# Altium PCB Sound_v2_PCB.PcbDoc
Units mm, origin at the board's own origin, x right, y up, seen from the top; angles counter-clockwise.
Board outline 22.5 x 38.5 mm, 2 copper layers (Top Layer, Bottom Layer), stack 1.571 mm thick; 13 components, 9 nets, 39 pads, 7 vias.
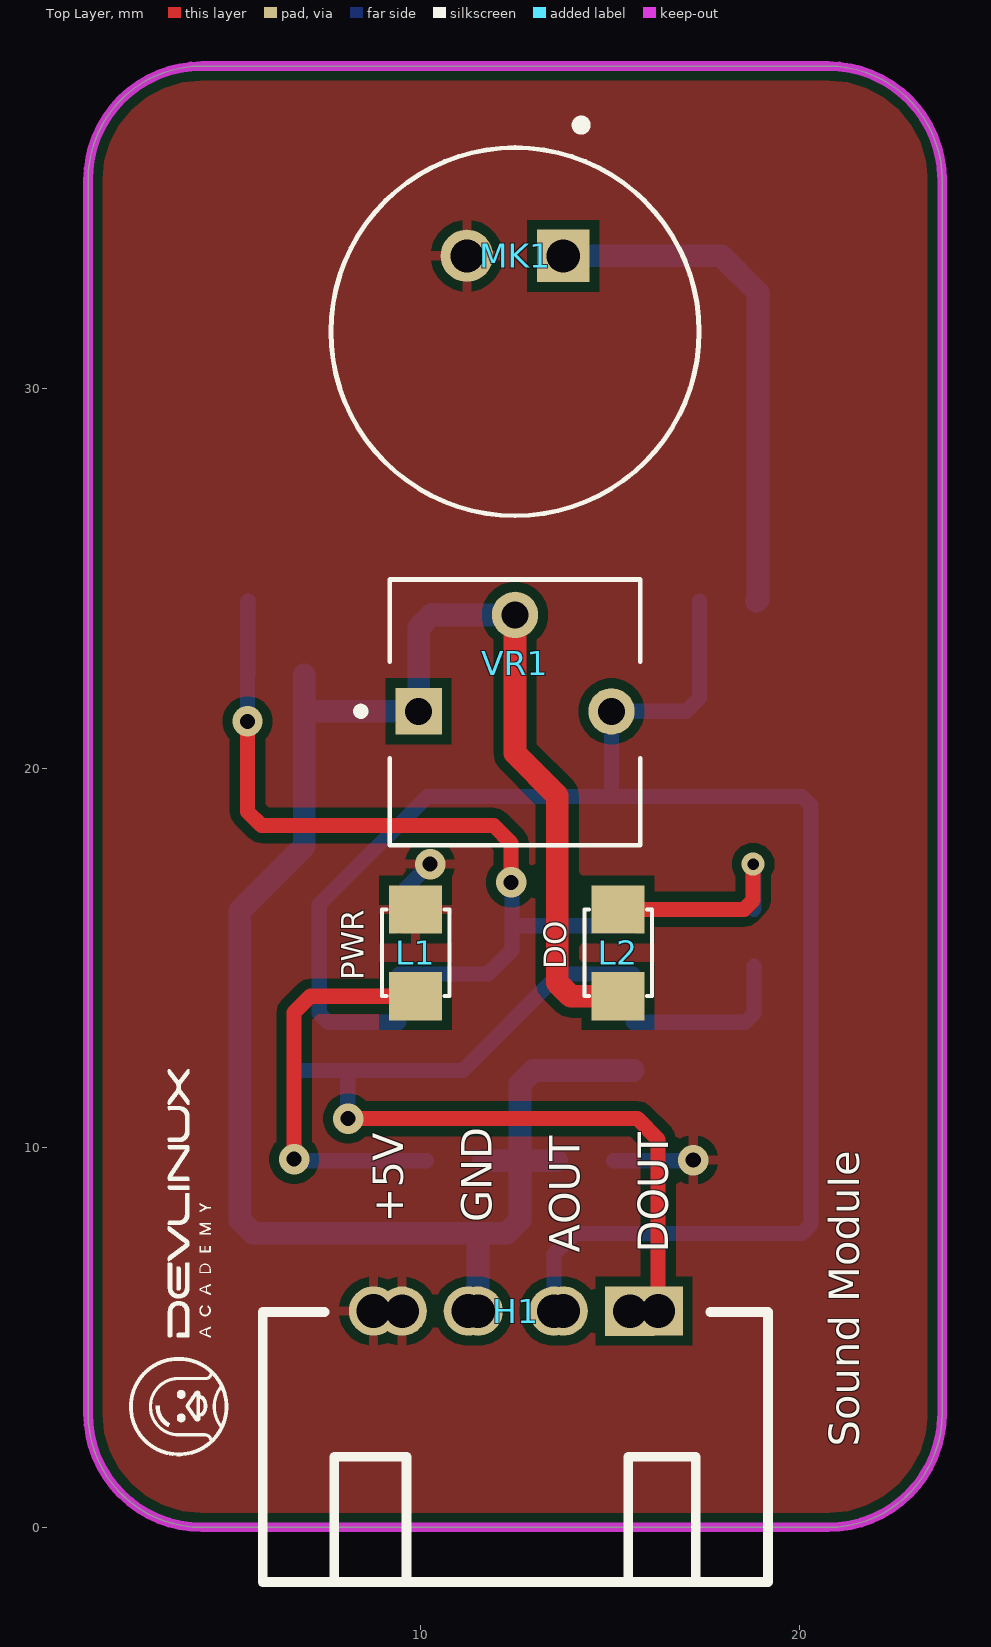
[diagram p0: Top Layer view]
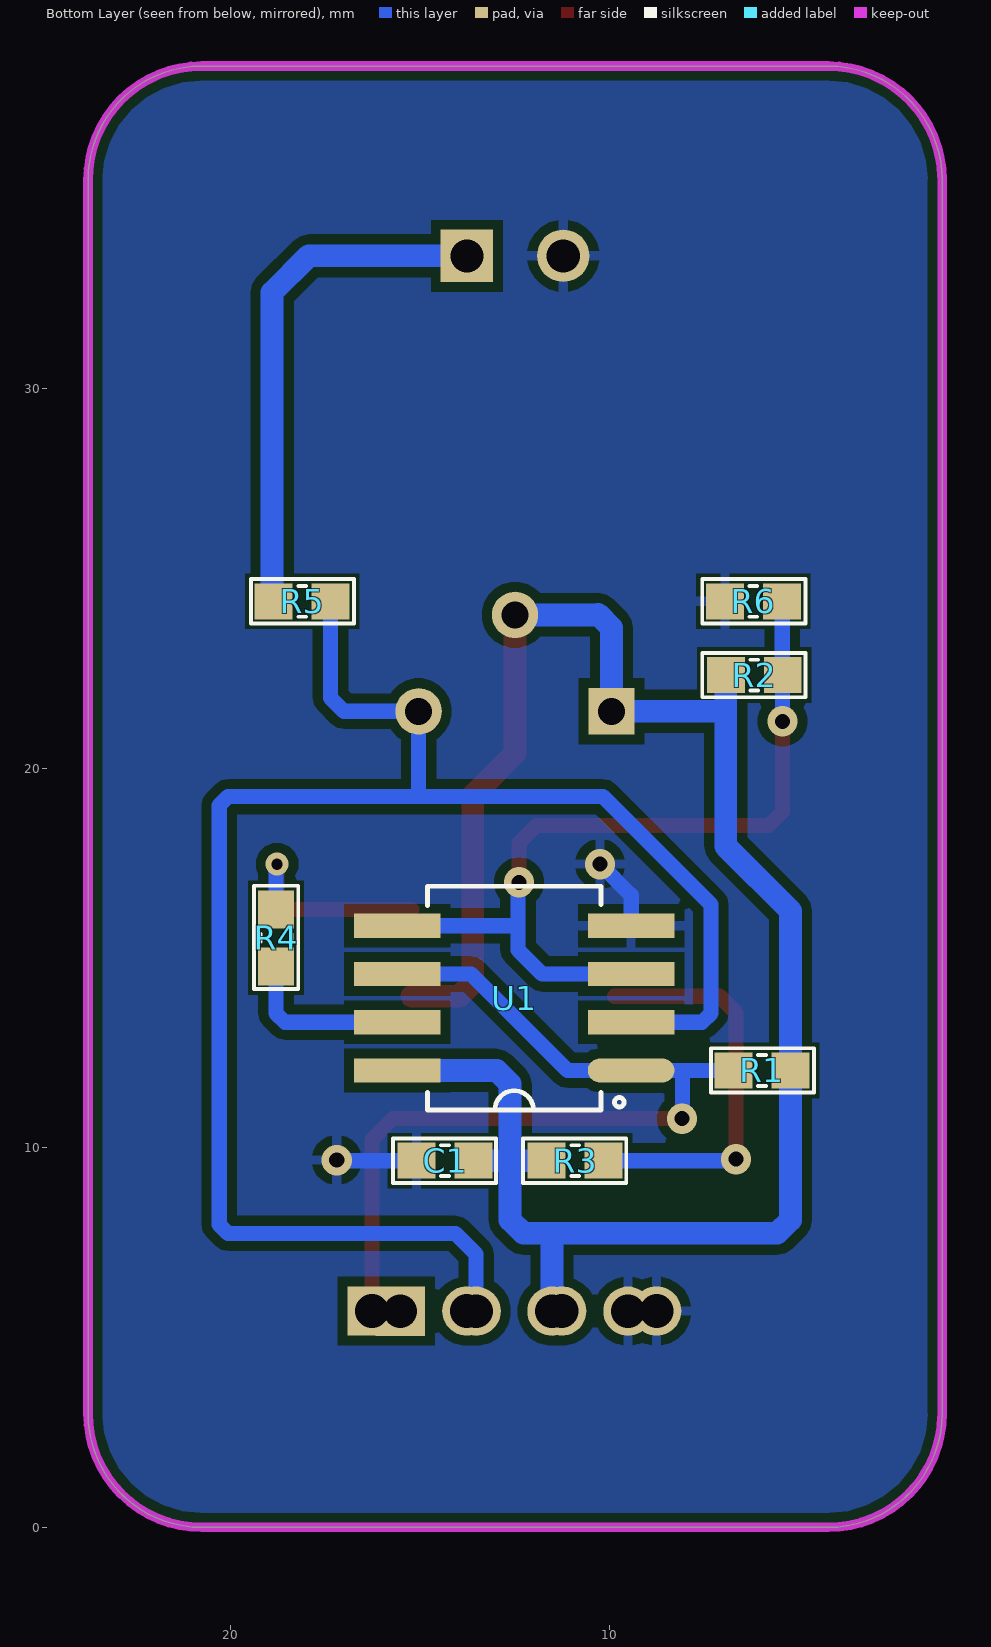
[diagram p1: Bottom Layer view, seen from below]
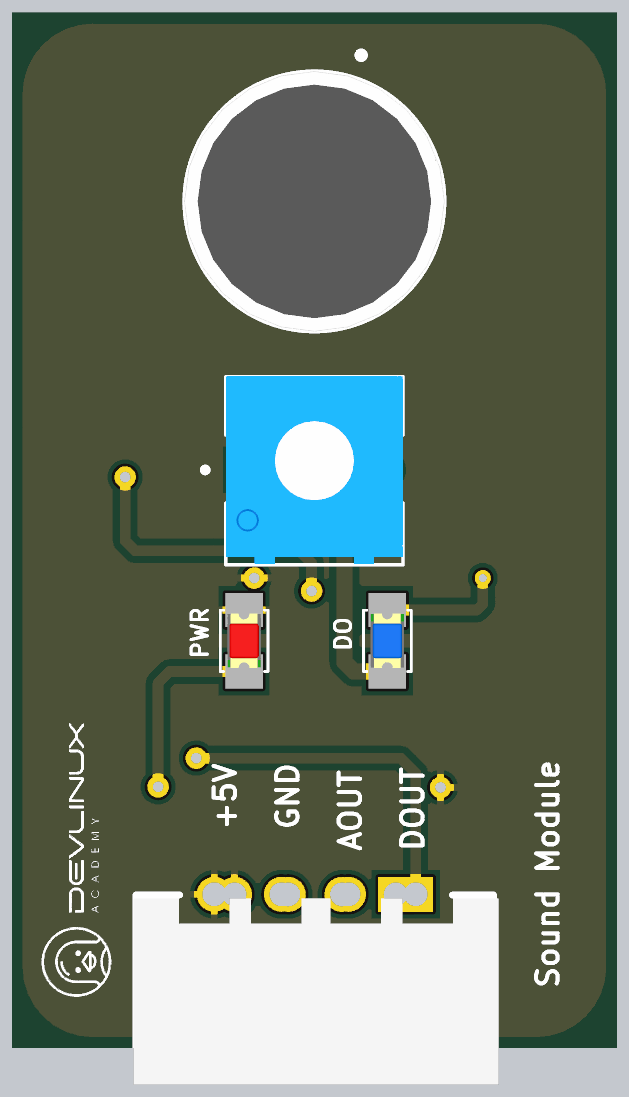
[diagram p2: 3D render of the assembled board from above, using the file's embedded part models]
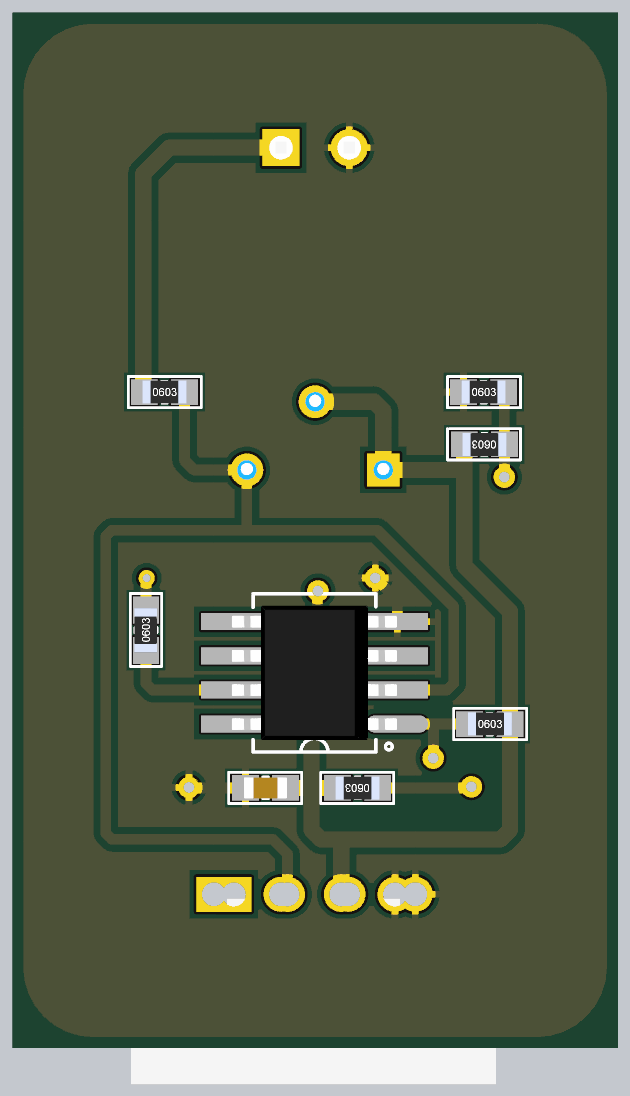
[diagram p3: 3D render of the assembled board from below, using the file's embedded part models]

## Layer stack, top to bottom
Top Solder: solder mask 0.0102, Solder Resist, Dk 3.5
Top Layer: signal copper 0.0356
Dielectric 1: dielectric 1.5, FR-4, Dk 4.8
Bottom Layer: signal copper 0.0356
Bottom Solder: solder mask 0.0102, Solder Resist, Dk 3.5

## Board outline
1.25,3 1.25,35.5 cw(c4.25,35.5) 4.25,38.5 20.75,38.5 cw(c20.75,35.5) 23.75,35.5 23.75,3 cw(c20.75,3) 20.75,0 4.25,0 cw(c4.25,3)

## Design rules (kind name [scope] priority, off if disabled: settings)
Clearance [All] p1: gap=0.254 ignorepadtopadclearanceinfootprint=FALSE except(0: Arc-Hole Track-Hole SMDPad-Hole THPad-Hole Via-Hole Fill-Hole Poly-Hole Region-Hole Text-Hole)
PolygonConnect [All] p1: connectstyle=Relief reliefconductorwidth=0.254 reliefentries=4 polygonreliefangle="90 Angle" airgapwidth=0.254
RoomDefinition Sound_v2_SCH [InComponentClass('Sound_v2_SCH')] p1: confinementstyle=ConfineIn formatcopy=TRUE lockcomponents=FALSE outline -18.472,-22.343 2.585,-22.343 2.585,-11.98 -18.472,-11.98
RoutingVias [All] p1: holewidth=0.4 width=0.8 viastyle="Through Hole" minholewidth=0.3 minwidth=0.6 maxholewidth=0.5 maxwidth=1
SolderMaskExpansion [All] p1: expansion=0.102 istentingtop=FALSE
Width [All] p1: maxlimit=0.6 minlimit=0.254 preferedwidth=0.4
30 further rules are at their usual default settings.

## Components (designator, comment, footprint, x,y, rotation, side; value= is the part's Value field where it differs from the comment)
C1 "100nF" "tu 0603" 14.345,9.661 r0 bottom
H1 "Header 4P 2.54 + 2.0 Duc Cong" "Header 4P DC 2.54 + 2.0" 16.245,5.675 r270 top
L1 "LED RED" LED-0805-Red 9.881,13.995 r90 top
L2 "LED 0805" LED-0805-Blue 15.215,16.281 r270 top
MK1 "CMA-4544PF-W" MIC_CMA-4544PF-W 12.5,31.5 r90 top
R1 "10k" "tro smd 0603" 5.994,12.04 r180 bottom
R2 "100k" "tro smd 0603" 6.198,22.454 r0 bottom
R3 "1k" "tro smd 0603" 10.916,9.661 r0 bottom
R4 "10k" "tro smd 0603" 18.796,15.532 r90 bottom
R5 "150" "tro smd 0603" 18.11,24.399 r180 bottom
R6 "100k" "tro smd 0603" 6.223,24.399 r180 bottom
U1 "LM393DT" SOIC8_50_328_25X90_SMT 12.522,13.945 r0 bottom
VR1 "Bien tro vuong" TRIM_3362P-1-102 12.5,21.5 r0 top

## Footprints (in the part's own frame and the unit in brackets; to place one, negate y for a bottom-side part, rotate by r counter-clockwise, add the part's x,y. Pads: shape width x height; smd on the part's side, far side on the other; paste and mask are expansions set on the pad)
"Header 4P DC 2.54 + 2.0" [mm]
  rect 1.3x1.3 hole 0.889: 1(-0.025,0.025) 1(-0.022,-0.719)
  round 1.3 hole 0.889: 2(-0.025,-2.475) 2(-0.022,-2.719) 3(-0.025,-4.975) 3(-0.022,-4.719) 4(-0.025,-7.475) 4(-0.022,-6.718)
  silkscreen extent 0,-10.39 7.11,2.92, body extent 0.13,-10.48 7.06,3.11, height 7.38
LED-0805-Blue [mil]
  rect 50x55 smd: 1(0,0) 2(90,0)
  silkscreen extent 0,-35 90,35, body extent 5,-25 85,25, height 43
LED-0805-Red [mil]
  rect 50x55 smd: 1(0,0) 2(90,0)
  silkscreen extent 0,-35 90,35, body extent 5,-25 85,25, height 43
MIC_CMA-4544PF-W [mm]
  rect 1.378x1.378 / inner round 1.378 / far side rect 1.378x1.378 hole 0.87: 1(2,-1.27)
  round 1.378 hole 0.87: 2(2,1.27)
  silkscreen extent -4.85,-4.85 5.54,4.85, body extent -4.85,-4.85 4.85,4.85, height 4.7
SOIC8_50_328_25X90_SMT [mil] "SOIC"
  oval 90x25 smd mask+3: 1(-121.32,75)
  rect 90x25 smd mask+3: 2(-121.32,25) 3(-121.32,-25) 4(-121.32,-75) 5(121.32,-75) 6(121.32,-25) 7(121.32,25) 8(121.32,75)
  silkscreen extent -114,-116 90,116, body extent -121,-98 121,98, height 79
TRIM_3362P-1-102 [mm]
  rect 1.222x1.222 / inner round 1.222 / far side rect 1.222x1.222 hole 0.714: 1(-2.54,0)
  round 1.222 hole 0.714: 2(0,2.54) 3(2.54,0)
  silkscreen extent -4.16,-3.53 3.3,3.47, body extent -3.3,-3.5 3.3,3.49, height 4.88
"tro smd 0603" [mm] "Chip Capacitor, 2-Leads, Body 1,60x0,80mm, IPC Medium Density"
  rect 1x0.95 smd mask+0.076: 1(-0.75,0) 2(0.75,0)
  silkscreen extent -1.35,-0.58 1.37,0.58, body extent -0.82,-0.42 0.82,0.43, height 0.44
"tu 0603" [mm] "Chip Capacitor, 2-Leads, Body 1,60x0,80mm, IPC Medium Density"
  rect 1x0.95 smd mask+0.076: 1(-0.75,0) 2(0.75,0)
  silkscreen extent -1.35,-0.58 1.37,0.58, body extent -0.8,-0.4 0.8,0.4, height 0.9

## Part data
C1: library part "Tu 0603 104 50V 10%", "Dán", Chung_Loai=Dán, Don_Vi=Con, Ma_Hang=MH004568, So_Chan=2, Ten_Linh_Kien="Tụ 0603 104-100nF 10% 50V"
H1: "Cắm", Chung_Loai=Cắm, Don_Vi=Con, Ma_Hang=MH001310, Ten_Linh_Kien="Header 4P XH2.54-4P Đực Cong"
L1: library part "LED 0805 Do", "Dán", Chung_Loai=Dán, Don_Vi=Con, Ma_Hang=MH000897, Ten_Linh_Kien="LED 0805 Màu Đỏ (Red)"
L2: library part "LED 0805 Xanh Duong", "Dán", Chung_Loai=Dán, Don_Vi=Con, Ma_Hang=MH002327, Ten_Linh_Kien="LED 0805 Màu Xanh Dương (Blue)"
MK1: "9.7 mm, Omnidirectional, PCB Mount, 3.0 Vdc, Electret Condenser Microphone", Package=None, Check_prices=https://www.snapeda.com/parts/CMA-4544PF-W/Same+Sky/view-part/?ref=eda, MF="Same Sky", MP=CMA-4544PF-W, SnapEDA_Link=https://www.snapeda.com/parts/CMA-4544PF-W/Same+Sky/view-part/?ref=snap
R1 R2 R4 R6: library part "Tro 0603 5% 100k", "Dán", Chung_Loai=Dán, Don_Vi=Con, Ma_Hang=MH006314, So_Chan=2, Ten_Linh_Kien="Trở 0603 5% 100k"
R3: library part "Tro 0603 1% 1k", "Dán", Chung_Loai=Dán, Don_Vi=Con, Ma_Hang=MH006334, So_Chan=2, Ten_Linh_Kien="Trở 0603 1% 1k"
R5: library part "Tro 0603 5% 150R", "Dán", Chung_Loai=Dán, Don_Vi=Con, Ma_Hang=MH006318, So_Chan=2, Ten_Linh_Kien="Trở 0603 5% 150R"
U1: library part IC_LM393DT, "Comparator General Purpose CMOS, DTL, ECL, MOS, Open-Collector, TTL 8-SO", Alternate Part Number-1=NA, Case/Package=SOIC8, Manufacturer="Texas Instruments", Manufacturer Part Number=LM393DT, Supplier Part Number-1=LM393DT, Supplier-1=ARROW
VR1: "TRIMMER - 1/4in SQ ST CERMET", Package="3362P-1 Bourns Inc.", Check_prices=https://www.snapeda.com/parts/3362P-1-102/Bourns/view-part/?ref=eda, MF=Bourns, MP=3362P-1-102, SnapEDA_Link=https://www.snapeda.com/parts/3362P-1-102/Bourns/view-part/?ref=snap

## Via types
v1: diameter 0.8, hole 0.4, Top Layer to Bottom Layer, 6 vias
v2: diameter 0.6, hole 0.3, Top Layer to Bottom Layer, 1 vias

## Nets (pads, with @x,y where several pads share a name; then routed paths per layer and width w, separated by ;. In a path a pad name is that pad's centre, name@x,y a point inside that pad or via, vN(x,y) a via of type N, cw(c..) or ccw(c..) an arc to the next point about the centre after c; other vN are vias at no path point)
+5: C1.1 H1.3 L2.2 R1.2 R2.2 R3.2 U1.8 VR1.1 VR1.2 | length 53
  Top Layer w0.6: VR1.2 12.5,20.393 13.614,19.279 13.614,14.347 13.966,13.995 L2.2
  Bottom Layer w0.6: R2.2 6.948,21.539 ; H1.3@11.526,5.697 11.526,7.462 ; R3.2 12.631,9.661 ; VR1.2 10.325,24.04 10.311,24.054 9.96,23.702 VR1.1 6.987,21.5 6.948,21.539 ; C1.1 12.631,9.661 ; U1.8 12.982,12.04 12.631,11.688 12.631,9.661 ; 6.948,21.539 6.948,17.946 5.244,16.243 R1.2 5.244,8.098 5.596,7.747 11.526,7.747 11.811,7.747 12.279,7.747 12.631,8.098 12.631,9.661
A_OUT: H1.2 R5.2 U1.2 VR1.3 | length 46.2
  Bottom Layer w0.4: U1.2 7.575,13.31 7.341,13.544 7.341,16.408 10.185,19.253 15.04,19.253 ; H1.2@13.526,5.697 13.526,7.201 14.072,7.747 20.06,7.747 20.295,7.981 20.295,19.019 20.06,19.253 15.04,19.253 ; H1.2@13.77,5.697 H1.2@13.77,5.7 ; R5.2 17.36,21.851 17.009,21.5 VR1.3 15.04,19.253
D_OUT: H1.1 R1.1 U1.1 U1.6 | length 24.1
  Top Layer w0.4: v1(8.103,10.77) 15.723,10.77 16.27,10.222 H1.1@16.27,5.7
  Bottom Layer w0.4: R1.1 8.093,12.04 ; v1(8.103,10.77) 8.093,10.78 8.093,12.04 ; U1.6 13.661,14.58 11.121,12.04 U1.1 8.093,12.04
GND: C1.2 H1.4 L1.2 MK1.2 R6.1 U1.4 | length 4.1
  Bottom Layer w0.4: U1.4 9.441,16.654 v1(10.262,17.475) ; C1.2 17.18,9.661 v1(17.196,9.677)
NetL1_1: L1.1 R3.1 | length 10.7
  Top Layer w0.4: v1(6.68,9.703) 6.68,13.564 7.112,13.995 L1.1
  Bottom Layer w0.4: v1(6.68,9.703) 6.722,9.661 R3.1
NetL2_1: L2.1 R4.2 | length 5.8
  Top Layer w0.4: L2.1 18.536,16.281 18.771,16.516 v2(18.771,17.475)
  Bottom Layer w0.4: v2(18.771,17.475) 18.796,17.45 R4.2
NetMK1_1: MK1.1 R5.1 | length 13.7
  Bottom Layer w0.6: MK1.1 17.935,33.5 18.9,32.535 18.9,24.438 R5.1
NetR2_1: R2.1 R6.2 U1.3 U1.5 | length 22.1
  Top Layer w0.4: v1(5.453,21.236) 5.453,18.855 5.817,18.491 11.938,18.491 12.395,18.034 v1(12.395,16.993)
  Bottom Layer w0.4: v1(5.453,21.236) 5.45,21.238 5.45,22.451 R2.1 5.46,22.466 5.46,24.386 R6.2 ; U1.3 11.786,14.58 12.421,15.215 12.421,16.967 v1(12.395,16.993) ; 12.421,15.85 U1.5
NetR4_1: R4.1 U1.7 | length 4.5
  Bottom Layer w0.4: U1.7 18.562,13.31 18.796,13.544 R4.1

## Polygon pours and split planes (outlines as drawn)
GND on Top Layer "NONET_L-01_P-001" (solid, remove dead copper, pour order 2): -1.6,46.177 29.21,46.177 29.058,46.025 29.058,-5.41 -1.702,-5.41 -3.353,-3.759
GND on Bottom Layer "NONET_L-01_P-001" (solid, remove dead copper, pour order 3): -1.753,46.203 -0.762,45.212 30.734,45.212 30.734,-2.845 27.711,-5.867 -3.81,-5.867

## Keep-outs
Keep-Out Layer:
  the board outline again, w0.254

## Silkscreen, mask and mechanical layers (free items; w line width, h text height)
Top Overlay:
  drawing of 21 lines, arcs and shapes, not listed
  text "DO" at 13.85,14.7 h0.6 r90
  text "PWR" at 8.516,14.42 h0.6 r90
  text "+5V" at 9.553,8.024 h0.8 r90
  text "GND" at 11.881,8.036 h0.8 r90
  text "AOUT" at 14.209,7.237 h0.8 r90
  text "DOUT" at 16.538,7.237 h0.8 r90
  text "Sound Module" at 21.567,2.131 h0.8 r90